# EAGLE board blank_rev_2 (EAGLE 6.3)
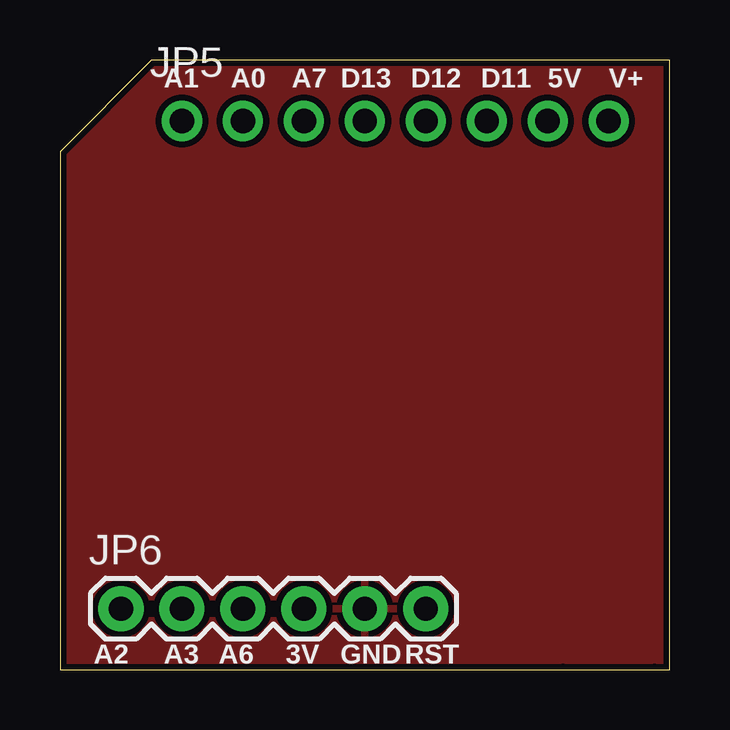
[diagram p0: board, top side]
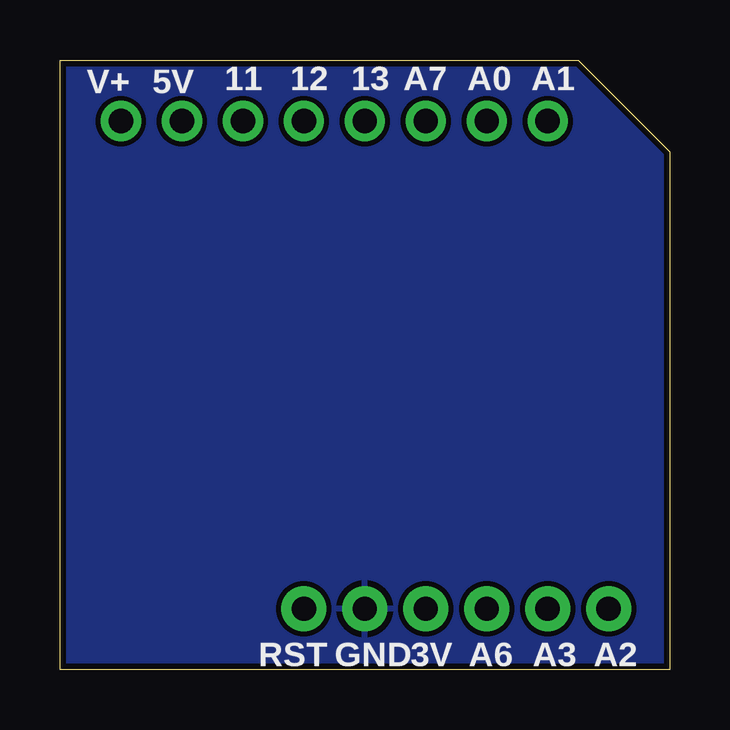
[diagram p1: board, bottom side, seen from below]

Size 25.4 x 25.4 mm. Coordinates in mm from the lower left corner, seen from the top.
Outline: 25.4,25.4 25.4,21.59 25.4,0 24.77,0 20.96,0 0,0 0,21.59
Outline: 25.4,25.4 3.81,25.4 0,21.59
Outline: 0,21.59 0,21.59
Copper layers (1*16): Top 0.035mm / dielectric 1.5mm / Bottom 0.035mm
Design rules "SparkFun": minimum track width 8mil, minimum drill 20mil, track to track 8mil, track to pad 8mil, pad to pad 8mil, via to via 8mil, smd to smd 8mil, copper to edge 10mil, drill to drill 8mil, minimum pad ring 12mil, minimum via ring 10mil, stop-mask expansion 4mil, vias tented up to drill 25mil, thermal gap 10mil
Net classes: 0 default: width 0.203 mm; 1 vcc: width 0.254 mm

## Footprints (pad centres in the part's own frame; a part is rotated, then mirrored left to right if it is on the bottom)
1X08 = drill 1.016 pad 1.676: 1 0,0; 2 2.54,0; 3 5.08,0; 4 7.62,0; 5 10.16,0; 6 12.7,0; 7 15.24,0; 8 17.78,0
1X06 = drill 1.016 pad 1.88: 1 0,0; 2 2.54,0; 3 5.08,0; 4 7.62,0; 5 10.16,0; 6 12.7,0

## Placement (x,y rotation side)
JP5  [1X08]  5.08,22.86 0 top
JP6  [1X06]  2.54,2.54 0 top

## Library data of the parts
JP5 = SparkFun_mod
JP6 = SparkFun

## Nets
+3V3: JP6.4
+5V: JP5.7
A0: JP5.2
A1: JP5.1
A2: JP6.1
A3: JP6.2
A6: JP6.3
A7: JP5.3
D11: JP5.6
D12: JP5.5
D13: JP5.4
GND: JP6.5
RESET: JP6.6
V+: JP5.8

## Tracks (layer width: path | path; a pad name or v marks a point on that pad's centre or on a via)
GND
  pour Bottom: -1.27,26.67 26.67,26.67 26.67,-1.27 -1.27,-1.27
  pour Top (isolate 0.254): -0.64,26.04 26.67,26.04 26.67,0 26.04,-0.64 -0.64,-0.64

## Text on the board
tPlace: A1 | A0 | A7 | D13 | D12 | D11 | 5V | V+ | MakersBox.blogspot.com | NODE | Atmega328 | A2 | A3 | A6 | 3V | GND | RST
bPlace: A1 | A0 | A7 | 13 | 12 | 5V | V+ | 11 | i2c | Apr 12 | NODE | MakersBox.blogspot.com | A2 | A3 | A6 | 3V | GND | RST